# Altium PCB GateDrive.PcbDoc (part 2 of 3)
Units mm, origin at the board's own origin, x right, y up, seen from the top; angles counter-clockwise.
Board outline 204.3 x 103 mm, 4 copper layers (Top Layer, Internal Plane 1, Internal Plane 2, Bottom Layer), stack 0.778 mm thick; 236 components, 133 nets, 651 pads, 165 vias.
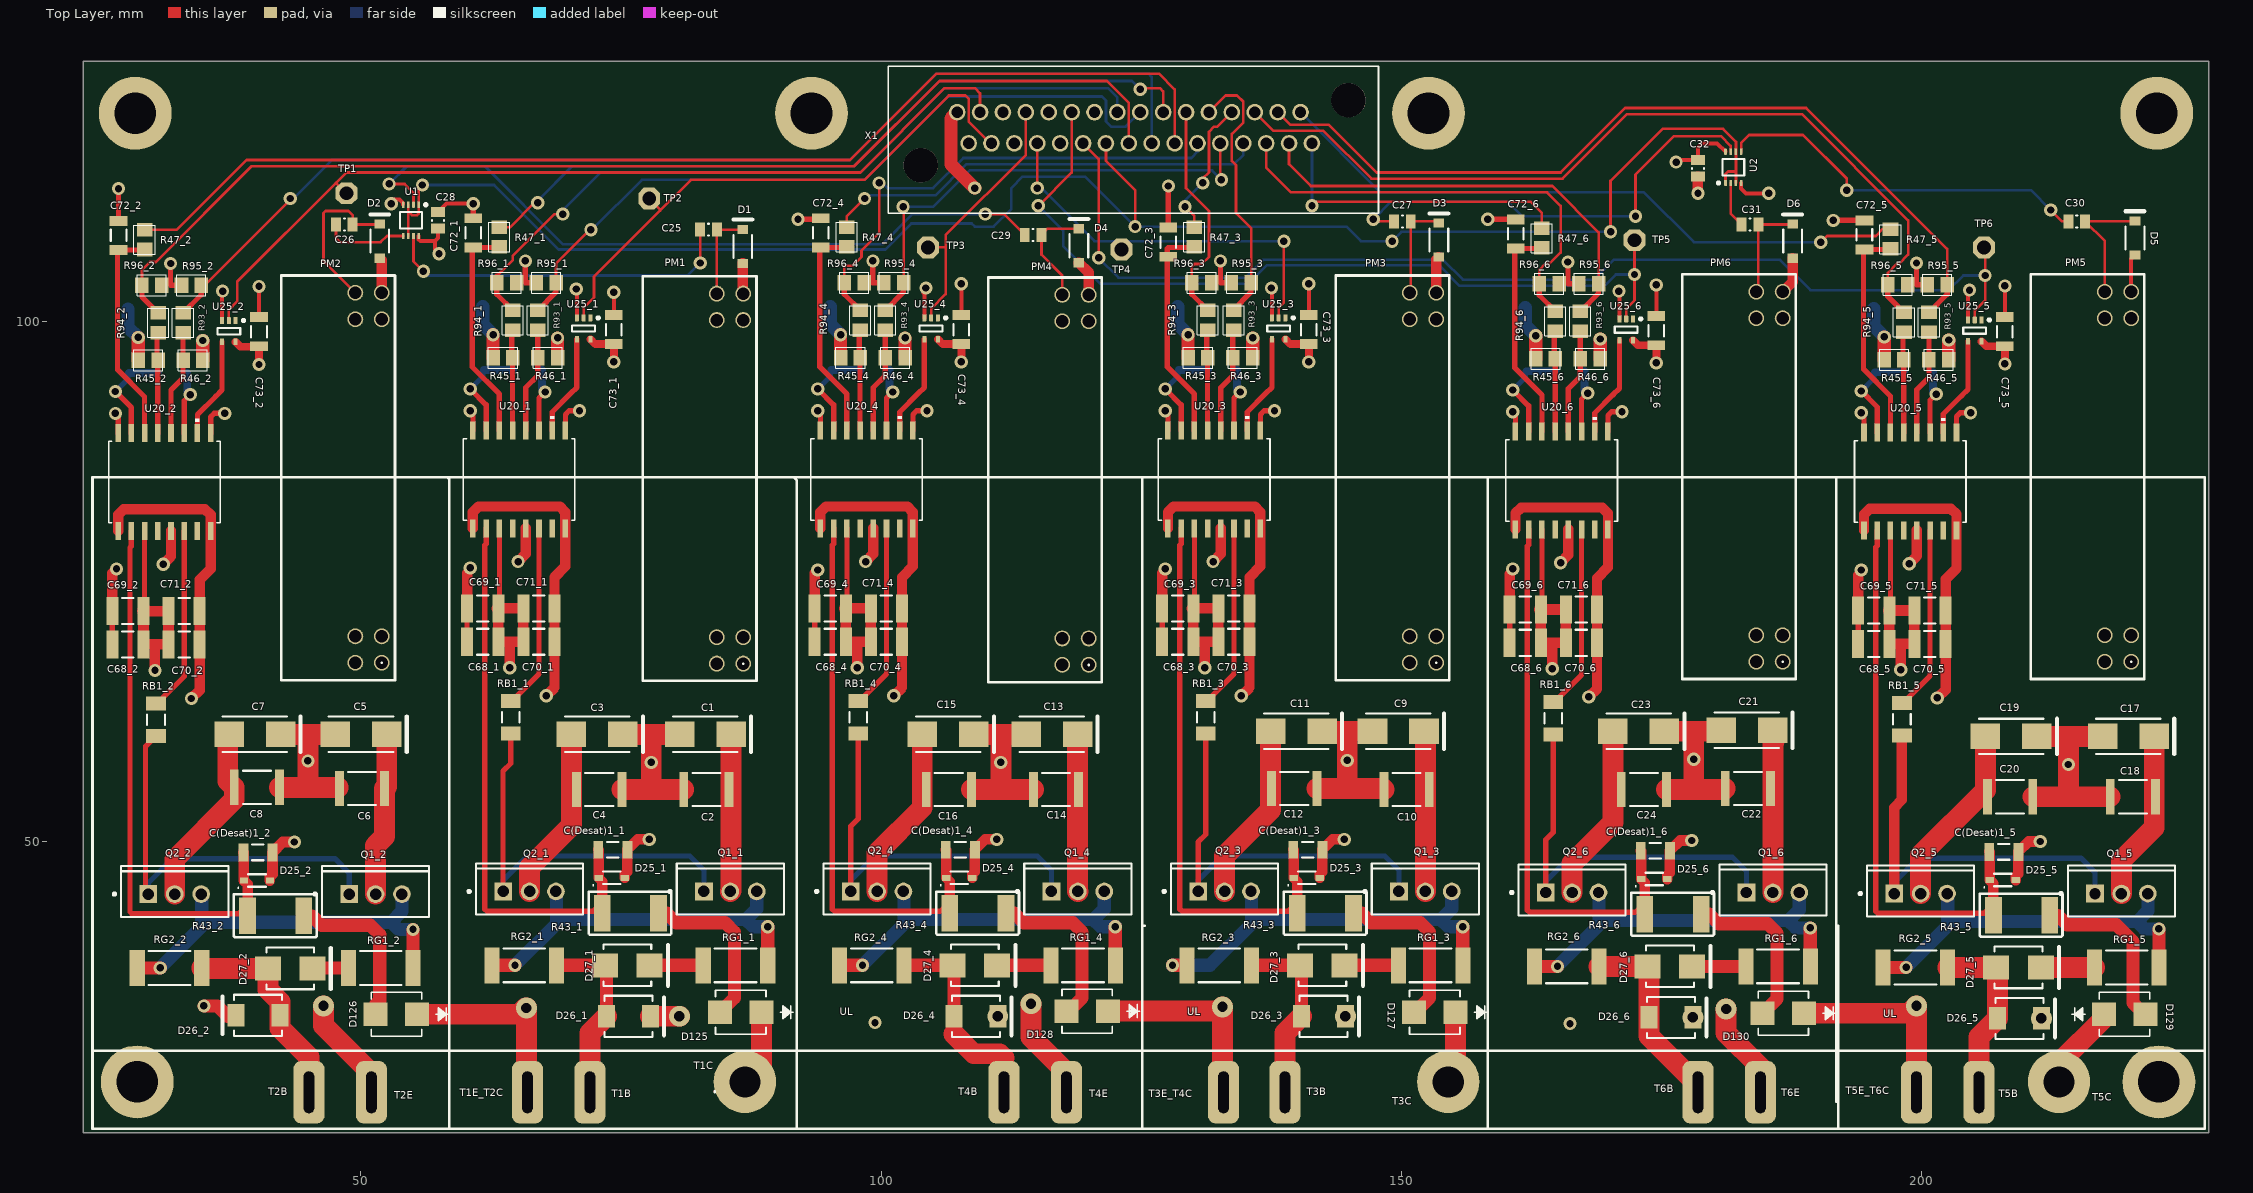
[diagram p0: Top Layer view]

## Via types
v1: diameter 1.27, hole 0.711, Top Layer to Bottom Layer, 154 vias
v2: diameter 2, hole 1, Top Layer to Bottom Layer, 11 vias

## Nets (pads, with @x,y where several pads share a name; then routed paths per layer and width w, separated by ;. In a path a pad name is that pad's centre, name@x,y a point inside that pad or via, vN(x,y) a via of type N, cw(c..) or ccw(c..) an arc to the next point about the centre after c; other vN are vias at no path point) (continued)
IGBT6_G: (continued)
  Top Layer w2: RG2_6.2@169,38 D27_6.1@173.65,38 ; D27_6.1@173.79,37.86 D26_6.1@173.79,33.1 173.79,31.31 T6B.1@178.5,26.6
IGBT_UPHASE_B: U20_2.10 U25_2.4 | length 9.8
  Top Layer w0.508: U20_2.10@34.28,89.25 34.28,91.03 36.05,92.8 36.65,93.4 U25_2.4@36.65,98.025
IGBT_UPHASE_T: U20_1.10 U25_1.4 | length 9.8
  Top Layer w0.508: U20_1.10@68.38,89.5 68.38,91.28 70.15,93.05 70.75,93.65 U25_1.4@70.75,98.275
IGBT_VPHASE_B: U20_4.10 U25_4.4 | length 9.8
  Top Layer w0.508: U20_4.10@101.78,89.5 101.78,91.28 103.55,93.05 104.15,93.65 U25_4.4@104.15,98.275

## Text inside footprints (layer, text, board x,y; h text height)
D130: Mechanical 7 "0.181in/4.597mm" at 189.081,39.164 h0.64 r180; Mechanical 7 "0.156in/3.962mm" at 178.813,33.817 h0.64 r180; Mechanical 7 "0.087in/2.21mm" at 180.858,33.817 h0.64 r180; Mechanical 7 "0.063in/1.6mm" at 190.758,29.741 h0.64 r180; Mechanical 7 "0.22in/5.588mm" at 188.922,27.201 h0.64 r180; Mechanical 7 "Alt 2 Padstyle: OX90Y60D30P" at 195.272,46.695 h1.27 r180; Mechanical 7 "Alt 1 Padstyle: OX60Y90D30P" at 195.272,44.79 h1.27 r180; Mechanical 7 "Default Padstyle: RX91Y89D0T" at 195.59,42.885 h1.27 r180
U20_1: Mechanical 13 "*" at 61.319,81.067 h1.27 r90; Mechanical 7 "0.04in/1.016mm" at 73.485,77.88 h0.64 r90; Mechanical 7 "0.05in/1.27mm" at 61.713,72.927 h0.64 r90; Mechanical 7 "0.412in/10.465mm" at 65.523,91.646 h0.64 r90; Mechanical 7 "0.41in/10.414mm" at 55.655,82.42 h0.64 r90; Mechanical 7 "0.299in/7.595mm" at 57.56,82.42 h0.64 r90; Mechanical 7 "Alt 2 Padstyle: OX90Y60D30P" at 83.137,76.229 h1.27 r90; Mechanical 7 "Alt 1 Padstyle: OX60Y90D30P" at 81.613,76.229 h1.27 r90; Mechanical 7 "Pin One Padstyle: RX68Y21D0T" at 77.041,75.911 h1.27 r90; Mechanical 7 "Default Padstyle: RX68Y21D0T" at 75.517,75.911 h1.27 r90
U20_2: Mechanical 13 "*" at 27.219,80.817 h1.27 r90; Mechanical 7 "0.04in/1.016mm" at 39.385,77.63 h0.64 r90; Mechanical 7 "0.05in/1.27mm" at 27.613,72.677 h0.64 r90; Mechanical 7 "0.412in/10.465mm" at 31.423,91.396 h0.64 r90; Mechanical 7 "0.41in/10.414mm" at 21.555,82.17 h0.64 r90; Mechanical 7 "0.299in/7.595mm" at 23.46,82.17 h0.64 r90; Mechanical 7 "Alt 2 Padstyle: OX90Y60D30P" at 49.037,75.979 h1.27 r90; Mechanical 7 "Alt 1 Padstyle: OX60Y90D30P" at 47.513,75.979 h1.27 r90; Mechanical 7 "Pin One Padstyle: RX68Y21D0T" at 42.941,75.661 h1.27 r90; Mechanical 7 "Default Padstyle: RX68Y21D0T" at 41.417,75.661 h1.27 r90
U20_3: Mechanical 13 "*" at 128.119,81.067 h1.27 r90; Mechanical 7 "0.04in/1.016mm" at 140.285,77.88 h0.64 r90; Mechanical 7 "0.05in/1.27mm" at 128.513,72.927 h0.64 r90; Mechanical 7 "0.412in/10.465mm" at 132.323,91.646 h0.64 r90; Mechanical 7 "0.41in/10.414mm" at 122.455,82.42 h0.64 r90; Mechanical 7 "0.299in/7.595mm" at 124.36,82.42 h0.64 r90; Mechanical 7 "Alt 2 Padstyle: OX90Y60D30P" at 149.937,76.229 h1.27 r90; Mechanical 7 "Alt 1 Padstyle: OX60Y90D30P" at 148.413,76.229 h1.27 r90; Mechanical 7 "Pin One Padstyle: RX68Y21D0T" at 143.841,75.911 h1.27 r90; Mechanical 7 "Default Padstyle: RX68Y21D0T" at 142.317,75.911 h1.27 r90
U20_4: Mechanical 13 "*" at 94.719,81.067 h1.27 r90; Mechanical 7 "0.04in/1.016mm" at 106.885,77.88 h0.64 r90; Mechanical 7 "0.05in/1.27mm" at 95.113,72.927 h0.64 r90; Mechanical 7 "0.412in/10.465mm" at 98.923,91.646 h0.64 r90; Mechanical 7 "0.41in/10.414mm" at 89.055,82.42 h0.64 r90; Mechanical 7 "0.299in/7.595mm" at 90.96,82.42 h0.64 r90; Mechanical 7 "Alt 2 Padstyle: OX90Y60D30P" at 116.537,76.229 h1.27 r90; Mechanical 7 "Alt 1 Padstyle: OX60Y90D30P" at 115.013,76.229 h1.27 r90; Mechanical 7 "Pin One Padstyle: RX68Y21D0T" at 110.441,75.911 h1.27 r90; Mechanical 7 "Default Padstyle: RX68Y21D0T" at 108.917,75.911 h1.27 r90
U20_5: Mechanical 13 "*" at 195.019,80.867 h1.27 r90; Mechanical 7 "0.04in/1.016mm" at 207.185,77.68 h0.64 r90; Mechanical 7 "0.05in/1.27mm" at 195.413,72.727 h0.64 r90; Mechanical 7 "0.412in/10.465mm" at 199.223,91.446 h0.64 r90; Mechanical 7 "0.41in/10.414mm" at 189.355,82.22 h0.64 r90; Mechanical 7 "0.299in/7.595mm" at 191.26,82.22 h0.64 r90; Mechanical 7 "Alt 2 Padstyle: OX90Y60D30P" at 216.837,76.029 h1.27 r90; Mechanical 7 "Alt 1 Padstyle: OX60Y90D30P" at 215.313,76.029 h1.27 r90; Mechanical 7 "Pin One Padstyle: RX68Y21D0T" at 210.741,75.711 h1.27 r90; Mechanical 7 "Default Padstyle: RX68Y21D0T" at 209.217,75.711 h1.27 r90
U20_6: Mechanical 13 "*" at 161.519,80.967 h1.27 r90; Mechanical 7 "0.04in/1.016mm" at 173.685,77.78 h0.64 r90; Mechanical 7 "0.05in/1.27mm" at 161.913,72.827 h0.64 r90; Mechanical 7 "0.412in/10.465mm" at 165.723,91.546 h0.64 r90; Mechanical 7 "0.41in/10.414mm" at 155.855,82.32 h0.64 r90; Mechanical 7 "0.299in/7.595mm" at 157.76,82.32 h0.64 r90; Mechanical 7 "Alt 2 Padstyle: OX90Y60D30P" at 183.337,76.129 h1.27 r90; Mechanical 7 "Alt 1 Padstyle: OX60Y90D30P" at 181.813,76.129 h1.27 r90; Mechanical 7 "Pin One Padstyle: RX68Y21D0T" at 177.241,75.811 h1.27 r90; Mechanical 7 "Default Padstyle: RX68Y21D0T" at 175.717,75.811 h1.27 r90